# EAGLE board Up (EAGLE 8.2.2)
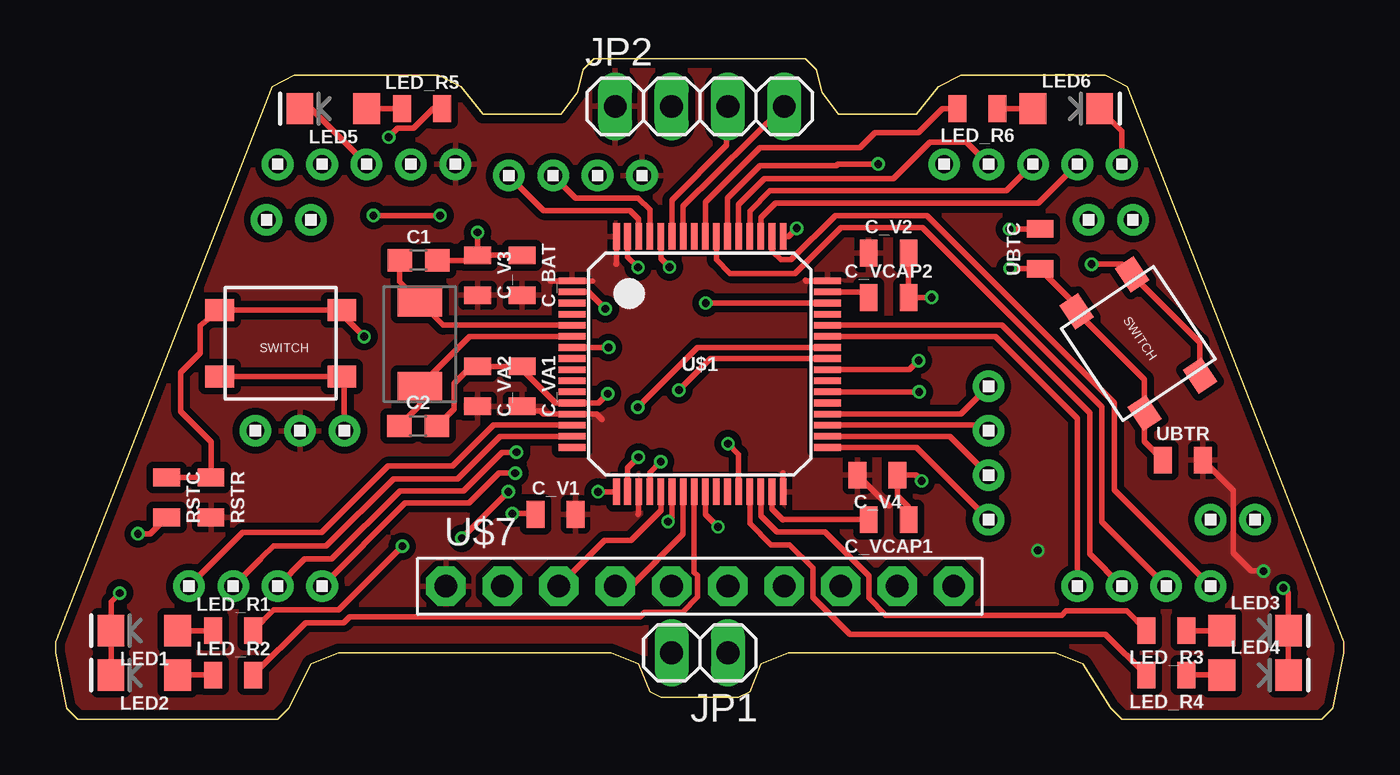
[diagram p0: board, top side]
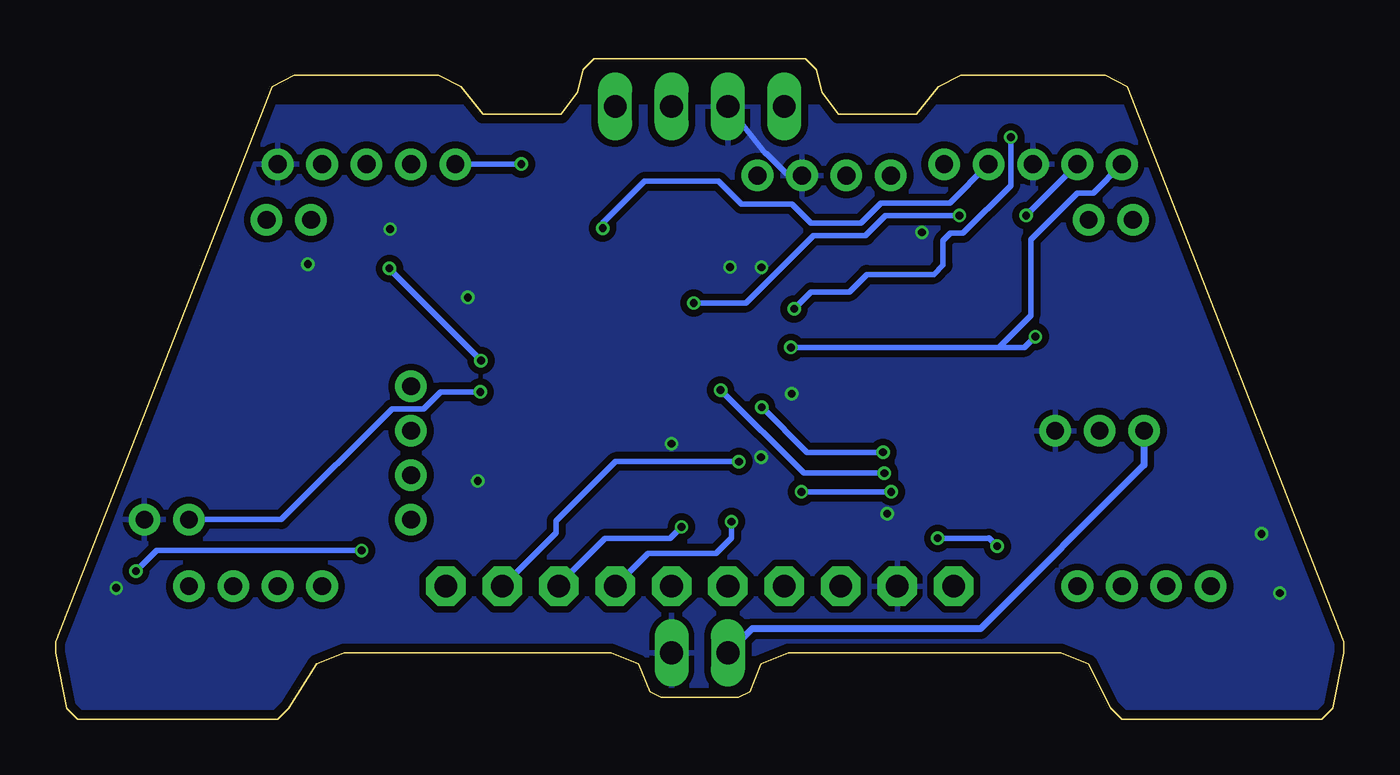
[diagram p1: board, bottom side, seen from below]

Size 58 x 29.75 mm. Coordinates in mm from the lower left corner, seen from the top.
Outline: 47.25,29 40.75,29 39.75,28.5 38.75,27.25 35.25,27.25 34.5,28.25 34.25,29.25 33.75,29.75 24.25,29.75 23.75,29.25 23.5,28.25 22.75,27.25 19.25,27.25 18.25,28.5 17.25,29 10.75,29 9.75,28.5 0,3.5 0,3 0.5,0.5 1,0 10,0 10.5,0.5 11.5,2.5 12.75,3 25,3 26.25,2.5 26.75,1.25 27.25,1 30.75,1 31.25,1.25 31.75,2.5 33,3 45,3 46.25,2.5 47.5,0.5 48,0 57,0 57.5,0.5 58,3 58,3.5 48.25,28.5 47.25,29
Copper layers (1*16): Top 0.035559375mm / dielectric 1.6mm / Bottom 0.035559375mm
Design rules "oshpark-2layer *": minimum track width 6mil, minimum drill 10mil, track to track 6mil, track to pad 6mil, pad to pad 6mil, via to via 6mil, smd to smd 6mil, copper to edge 15mil, drill to drill 6mil, minimum pad ring 5mil, minimum via ring 5mil, stop-mask expansion 2.5mil, vias tented up to drill 0mil, thermal gap 10mil

## Footprints (pad centres in the part's own frame; a part is rotated, then mirrored left to right if it is on the bottom)
0603 = smd 1.1 x 1: 1 -0.85,0; 2 0.85,0
0805 = smd 0.8 x 1.2: 1 -0.9,0; 2 0.9,0
OSC = smd 1.3 x 2: P$1 0,0.1; P$2 3.8,0.1
1X02 = drill 1.016 long: 1 -1.27,0; 2 1.27,0
1X04 = drill 1.016 long: 1 -3.81,0; 2 -1.27,0; 3 1.27,0; 4 3.81,0
LED-1206 = smd 1.2 x 1.4: A -1.5,0; C 1.5,0
1X4 = drill 0.8 pad 1.422: 1 -3,0; 2 -1,0; 3 1,0; 4 3,0
1X5 = drill 0.8 pad 1.422: 1 -4,0; 2 -2,0; 3 0,0; 4 2,0; 5 4,0
STM32F405/415_LQFP64 = smd 0.3 x 1.2: BOOT0 -1.75,5.75; PA3 -3.75,-5.75; PA4 -2.25,-5.75; PA5 -1.75,-5.75; PA6 -1.25,-5.75; PA7 -0.75,-5.75; PA14 3.75,5.75; PA15 3.25,5.75; PB0 0.75,-5.75; PB1 1.25,-5.75; PB2 1.75,-5.75; PB3 0.75,5.75; PB4 0.25,5.75; PB5 -0.25,5.75; PB6 -0.75,5.75; PB7 -1.25,5.75; PB8 -2.25,5.75; PB9 -2.75,5.75; PB10 2.25,-5.75; PB11 2.75,-5.75; PC4 -0.25,-5.75; PC5 0.25,-5.75; PC10 2.75,5.75; PC11 2.25,5.75; PC12 1.75,5.75; PD2 1.25,5.75; VCAP_1 3.25,-5.75; VDD_0 -2.75,-5.75; VDD_1 3.75,-5.75; VDD_3 -3.75,5.75; VSS_0 -3.25,-5.75; VSS_1 -3.25,5.75 | smd 1.2 x 0.3: NRST -5.75,0.75; PA0_WKUP -5.75,-2.75; PA1 -5.75,-3.25; PA2 -5.75,-3.75; PA8 5.75,0.25; PA9 5.75,0.75; PA10 5.75,1.25; PA11 5.75,1.75; PA12 5.75,2.25; PA13 5.75,2.75; PB12 5.75,-3.75; PB13 5.75,-3.25; PB14 5.75,-2.75; PB15 5.75,-2.25; PC0 -5.75,0.25; PC1 -5.75,-0.25; PC2 -5.75,-0.75; PC3 -5.75,-1.25; PC6 5.75,-1.75; PC7 5.75,-1.25; PC8 5.75,-0.75; PC9 5.75,-0.25; PC13 -5.75,3.25; PC14 -5.75,2.75; PC15 -5.75,2.25; PH0 -5.75,1.75; PH1 -5.75,1.25; VBAT -5.75,3.75; VCAP_2 5.75,3.25; VDD_2 5.75,3.75; VDDA -5.75,-2.25; VSSA -5.75,-1.75
1X3 = drill 0.8 pad 1.422: 1 -2,0; 2 0,0; 3 2,0
1X2 = drill 0.8 pad 1.422: 1 -1,0; 2 1,0
1X10-BIG = drill 1.016 pad 1.778 octagon: 1 -11.43,0; 2 -8.89,0; 3 -6.35,0; 4 -3.81,0; 5 -1.27,0; 6 1.27,0; 7 3.81,0; 8 6.35,0; 9 8.89,0; 10 11.43,0
4X4X1.5_SMD_SWITCH = smd 1.3 x 1: INA -2.75,-1.5; INB 2.75,-1.5; OUTA -2.75,1.5; OUTB 2.75,1.5

## Placement (x,y rotation side)
C1  12pF  [0603]  16.34,20.67 0 top
C2  12pF  [0603]  16.32,13.21 0 top
C_BAT  2.2uF  [0805]  21,20 270 top
C_V1  0.1uF  [0805]  22.51,9.23 0 top
C_V2  0.1uF  [0805]  37.5,21 0 top
C_V3  0.1uF  [0805]  19,20 270 top
C_V4  0.1uF  [0805]  37,11 180 top
C_VA1  2.2uF  [0805]  21,15 270 top
C_VA2  0.1uF  [0805]  19,15 270 top
C_VCAP1  2.2uF  [0805]  37.5,9 180 top
C_VCAP2  2.2uF  [0805]  37.5,19 0 top
CX5032GA  OSC  [OSC]  16.5,15 90 top
JP1  [1X02]  29,3 180 top
JP2  [1X04]  29,27.61 0 top
LED1  BLUE  [LED-1206]  4,4 180 top
LED2  BLUE  [LED-1206]  4,2 180 top
LED3  BLUE  [LED-1206]  54,4 0 top
LED4  BLUE  [LED-1206]  54,2 0 top
LED5  BLUE  [LED-1206]  12.5,27.5 180 top
LED6  BLUE  [LED-1206]  45.5,27.5 0 top
LED_R1  1k  [0805]  8,4 0 top
LED_R2  1k  [0805]  8,2 0 top
LED_R3  1k  [0805]  50,4 180 top
LED_R4  1k  [0805]  50,2 180 top
LED_R5  1k  [0805]  16.5,27.5 0 top
LED_R6  1k  [0805]  41.5,27.5 180 top
LM  1X4  [1X4]  9,6 0 top
RM  1X4  [1X4]  49,6 0 top
RSTC  0.1uf  [0805]  5,10 270 top
RSTR  10K  [0805]  7,10 270 top
SPI2  1X4  [1X4]  42,12 90 top
SWD  1X5  [1X5]  14,25 0 top
SWD1  1X5  [1X5]  44,25 180 top
U$1  STM32F405/415_LQFP64  [STM32F405/415_LQFP64]  29,16 0 top
U$3  1X3  [1X3]  11,13 180 top
U$4  1X2  [1X2]  10.5,22.5 0 top
U$5  1X2  [1X2]  47.5,22.5 0 top
U$7  PINHD-1X10  [1X10-BIG]  29,6 0 top
U$8  1X4  [1X4]  23.4,24.49 180 top
U$9  4X4X1.5_SMD_SWITCH  [4X4X1.5_SMD_SWITCH]  10.14,16.94 180 top
U$10  4X4X1.5_SMD_SWITCH  [4X4X1.5_SMD_SWITCH]  48.74,16.92 303.8 top
U$11  1X2  [1X2]  53,9 0 top
UBTC  0.1uf  [0805]  44.32,21.19 90 top
UBTR  10K  [0805]  50.75,11.68 0 top

## Library data of the parts
C1 C2 = SparkFun-Capacitors; PROD_ID: CAP-07876
C_BAT C_V1-C_V4 C_VA1 C_VA2 C_VCAP1 C_VCAP2 RSTC UBTC = SparkFun-Capacitors; PROD_ID: CAP-08402
CX5032GA = Cristal Oscillator
JP1 JP2 = pinhead
LED1-LED6 = SparkFun-LED; PROD_ID: DIO-09911
LED_R1-LED_R6 RSTR UBTR = SparkFun-Resistors; PROD_ID: RES-08474
LM RM SPI2 SWD SWD1 U$3-U$5 U$8 U$11 = headers(2mm)
U$1 = STM32F405RG
U$7 = adafruit
U$9 U$10 = 4X4X1.5_SMD_SWITCH

## Nets
3.3V: C_BAT.2 C_V1.2 C_V2.1 C_V3.2 C_V4.2 C_VA1.2 C_VA2.2 JP2.1 RSTR.2 SWD.5 U$1.VBAT U$1.VDD_0 U$1.VDD_1 U$1.VDD_2 U$1.VDD_3 U$1.VDDA U$3.2 U$7.1 U$8.1 UBTR.2
AGND: JP1.2 U$3.3
FAN_PWM: U$1.PC7 U$11.1
GND: C1.2 C2.2 C_BAT.1 C_V1.1 C_V2.2 C_V3.1 C_V4.1 C_VA1.1 C_VA2.1 C_VCAP1.1 C_VCAP2.2 JP1.1 JP2.2 LED1.C LED2.C LED3.C LED4.C LED5.C LED6.C RSTC.2 SWD1.1 SWD.3 U$1.BOOT0 U$1.PB2 U$1.VSS_0 U$1.VSS_1 U$1.VSSA U$3.1 U$7.2 U$8.2 U$9.OUTA U$9.OUTB U$10.OUTA U$10.OUTB U$11.2 UBTC.2
INT: U$1.PC5 U$7.8
LED1: LED_R1.2 U$1.PA3
LED2: LED_R2.2 U$1.PC4
LED3: LED_R4.2 U$1.PB10
LED4: LED_R3.2 U$1.PB11
LED5: LED_R5.2 U$1.PC13
LED6: LED_R6.2 U$1.PB4
LENCA: LM.1 U$1.PA0_WKUP
LENCB: LM.2 U$1.PA1
LPWMA: LM.4 U$1.PA8
LPWMB: LM.3 U$1.PA9
N$1: LED3.A LED_R3.1
N$2: LED4.A LED_R4.1
N$3: LED5.A LED_R5.1
N$4: LED6.A LED_R6.1
N$5: LED2.A LED_R2.1
N$8: LED1.A LED_R1.1
OSC_IN: C1.1 CX5032GA.P$2 U$1.PH0
OSC_OUT: C2.1 CX5032GA.P$1 U$1.PH1
RENCA: RM.3 U$1.PB3
RENCB: RM.4 U$1.PA15
RESET: RSTC.1 RSTR.1 SWD.1 U$1.NRST U$9.INA U$9.INB
RPWMA: RM.1 U$1.PA10
RPWMB: RM.2 U$1.PA11
RX: JP2.3 U$1.PB7
SCL: U$1.PB8 U$8.3
SDA: U$1.PB9 U$8.4
SPI1_MISO: U$1.PA6 U$7.7
SPI1_MOSI: U$1.PA7 U$7.4
SPI1_NSS: U$1.PA4 U$7.9
SPI1_SCK: U$1.PA5 U$7.3
SPI2_MISO: SPI2.3 U$1.PB14
SPI2_MOSI: SPI2.4 U$1.PB15
SPI2_NSS: SPI2.1 U$1.PB12
SPI2_SCK: SPI2.2 U$1.PB13
SPI3_MISO: SWD1.3 U$1.PC11
SPI3_MOSI: SWD1.4 U$1.PC12
SPI3_NSS: SWD1.5 U$1.PD2
SPI3_SCK: SWD1.2 U$1.PC10
SWCLK: SWD.4 U$1.PA14
SWDIO: SWD.2 U$1.PA13
TX: JP2.4 U$1.PB6
UBT: U$1.PC9 U$10.INA U$10.INB UBTC.1 UBTR.1
VCAP_1: C_VCAP1.2 U$1.VCAP_1
VCAP_2: C_VCAP2.1 U$1.VCAP_2

## Tracks (layer width: path | path; a pad name or v marks a point on that pad's centre or on a via)
3.3V  (via drill 0.35)
  Top 0.254: C_VA1.2 21.21,13.89 21.84,13.89 21.98,13.75 U$1.VDDA 24.36,13.75 24.6,13.51 | 26.22,9.24 26.25,9.27 U$1.VDD_0 | U$1.VDD_1 32.75,11.09 32.74,11.1 | U$1.VDD_2 33.79,19.75 33.76,19.78 | 24.17,19.74 24.16,19.75 U$1.VBAT 22.28,19.75 22.27,19.76 | U$1.VDD_3 25.25,20.51 25.24,20.5 | C_V4.2 37.4,9.7 37.42,9.7 37.51,9.61 37.54,9.61 | UBTR.2 53.01,10.32 53.01,8.59 53.01,7.5 53.83,6.68 v54.38,6.68
  Bottom 0.254: v54.38,6.68 53.45,7.61 v44.22,7.61
  pour Top (isolate 0.305): -4.12,-4.71 62.31,-4.71 62.31,31.86 -4.13,31.86
AGND
  Bottom 0.305: U$3.3 9,11.45 16.36,4.09 26.64,4.09 JP1.2
FAN_PWM  (via drill 0.35)
  Top 0.254: U$1.PC7 v38.88,14.75
  Bottom 0.254: v38.88,14.75 40.66,14.75 41.42,13.99 41.59,13.99 42.85,13.99 47.84,9 U$11.1
GND  (via drill 0.35)
  Top 0.254: C_V2.2 C_VCAP2.2 v39.44,19 | C_VCAP1.1 38.4,9.57 37.9,10.07 C_V4.1 38.73,11 v38.99,10.74 | C2.2 17.93,13.97 17.93,15.13 18.7,15.9 C_VA2.1 C_VA1.1 21,15.75 22.5,14.25 U$1.VSSA 24.44,14.25 v24.86,14.67 | C1.2 18.77,20.67 C_V3.1 | C_V3.1 C_BAT.1 | U$1.VSS_1 25.75,20.83 v26.22,20.36 | U$1.BOOT0 27.25,20.76 v27.64,20.37 | U$1.VSS_0 25.75,11.32 v26.24,11.81 | C_V1.1 21.57,9.27 v20.56,9.27 | U$1.PB2 30.75,11.94 v30.27,12.42 | C_V3.1 v19,21.93 | UBTC.2 v42.95,22.09 v42.94,22.08 | v46.64,20.5 48,20.5 U$10.OUTA 51.52,16.98 U$10.OUTB | U$9.OUTB U$9.OUTA 13,15.16 U$3.1 | RSTC.2 4.26,8.36 v3.71,8.36 | LED2.C LED1.C 2.5,5.3 v2.89,5.69 | LED4.C LED3.C 55.5,5.69 v55.27,5.92 | SWD.3 11.5,27.5 LED5.C | SWD1.1 48,26.5 LED6.C
  Bottom 0.254: JP2.2 26.04,25.48 25.99,25.48 25,24.49 U$8.2
  pour Bottom (isolate 0.305): -0.43,2.98 -0.43,27.57 57.55,27.57 58.44,27.57 58.44,2.81 58.44,-0.99 -0.21,-0.99 -0.44,-0.99 -0.44,2.99
INT  (via drill 0.35)
  Top 0.254: U$1.PC5 29.25,9.24 v29.82,8.67
  Bottom 0.254: v29.82,8.67 30.33,8.16 33.26,8.16 35.35,6.07 U$7.8
LED1  (via drill 0.35)
  Top 0.254: v15.61,7.8 12.74,4.93 9.83,4.93 LED_R1.2 | v20.38,10.25 v18.29,8.16 | U$1.PA3 v24.42,10.25
  Bottom 0.254: v15.61,7.8 15.98,8.17 15.99,8.16 v18.29,8.16 | v24.42,10.25 v20.38,10.25
LED2
  Top 0.254: U$1.PC4 28.75,6.63 28.9,6.48 28.9,5.52 28.21,4.83 26.52,4.83 26.32,4.63 13.24,4.63 12.96,4.35 11.25,4.35 LED_R2.2
LED3
  Top 0.254: U$1.PB10 31.25,8.82 32.2,7.87 33.05,7.87 34.09,6.83 34.09,5.5 35.75,3.84 47.26,3.84 LED_R4.2
LED4
  Top 0.254: U$1.PB11 31.75,9.17 32.48,8.44 34.63,8.44 36.61,6.46 36.61,5.47 37.37,4.71 37.37,4.69 45.29,4.69 45.48,4.88 48.22,4.88 LED_R3.2
LED5  (via drill 0.35)
  Top 0.254: v15,26.22 15.4,26.62 16.12,26.62 16.99,27.5 LED_R5.2 | U$1.PC13 23.99,19.25 v24.75,18.49
  Bottom 0.254: v15,26.22 15,24.04 17.15,21.89 17.72,21.89 18.05,21.56 18.05,20.45 18.46,20.04 21.48,20.04 22.27,19.25 23.99,19.25 v24.75,18.49
LED6
  Top 0.254: U$1.PB4 29.25,23.29 31.71,25.75 36.22,25.75 36.89,26.42 38.83,26.42 39.92,27.5 LED_R6.2 40.41,27.5
LENCA
  Top 0.254: U$1.PA0_WKUP 19.72,13.25 17.88,11.41 14.97,11.41 11.99,8.43 8.43,8.43 LM.1
LENCB
  Top 0.254: U$1.PA1 20.01,12.75 18.09,10.83 15.21,10.83 12.19,7.81 9.81,7.81 9.31,7.31 9.24,7.24 LM.2
LPWMA  (via drill 0.35)
  Top 0.254: U$1.PA8 29.48,16.25 v28.06,14.83 | LM.4 15.74,9.74 18.62,9.74 19.97,11.09 v20.69,11.09
  Bottom 0.254: v20.69,11.09 24.32,11.09 v28.06,14.83
LPWMB  (via drill 0.35)
  Top 0.254: LM.3 11.22,7.22 12.43,7.22 15.51,10.3 18.37,10.3 20.1,12.03 v20.75,12.03 | v26.21,14.06 28.9,16.75 U$1.PA9
  Bottom 0.254: v26.21,14.06 24.18,12.03 v20.75,12.03
N$1
  Top 0.254: LED_R3.1 LED3.A
N$2
  Top 0.254: LED_R4.1 LED4.A
N$3
  Top 0.254: LED5.A LED_R5.1
N$4
  Top 0.254: LED_R6.1 LED6.A
N$5
  Top 0.254: LED_R2.1 LED2.A
N$8
  Top 0.254: LED_R1.1 LED1.A
OSC_IN
  Top 0.254: C1.1 15.49,19.71 CX5032GA.P$2 17.45,17.75 U$1.PH0
OSC_OUT
  Top 0.254: C2.1 16.4,14.14 CX5032GA.P$1 18.65,17.25 U$1.PH1
RENCA
  Top 0.254: RM.3 47.1,8.9 47.1,14.06 39.02,22.15 35.34,22.15 33.28,20.08 30.37,20.08 29.75,20.7 U$1.PB3
RENCB
  Top 0.254: U$1.PA15 32.25,21.1 32.65,20.7 33.11,20.7 35.1,22.69 39.23,22.69 47.66,14.26 47.66,10.34 RM.4
RESET  (via drill 0.35)
  Top 0.254: U$1.NRST v24.9,16.75 | v13.89,17.24 12.72,18.41 U$9.INA U$9.INB 6.51,17.73 6.51,16.49 5.64,15.62 5.64,13.86 7,12.5 RSTR.1 RSTC.1
  Bottom 0.254: v24.9,16.75 15.54,16.75 | 15.54,16.75 14.1,18.19 14.1,21.61 12,23.71 11.29,23.71 SWD.1 | 15.54,16.75 14.38,16.75 v13.89,17.24
RPWMA
  Top 0.254: U$1.PA10 42.31,17.25 46,13.56 RM.1
RPWMB
  Top 0.254: U$1.PA11 42.6,17.75 46.55,13.8 46.55,7.45 RM.2
RX
  Top 0.254: U$1.PB7 27.75,23.39 30.21,25.85 JP2.3
SCL
  Top 0.254: U$8.3 23.41,23.48 26.23,23.48 26.75,22.96 U$1.PB8
SDA
  Top 0.254: U$8.4 21.97,22.92 25.85,22.92 26.25,22.52 U$1.PB9
SPI1_MISO  (via drill 0.35)
  Top 0.254: U$1.PA6 27.75,9.09 v27.57,8.91
  Bottom 0.254: v27.57,8.91 27.57,8.18 28.27,7.48 31.33,7.48 U$7.7
SPI1_MOSI
  Top 0.254: U$1.PA7 28.25,8.35 25.9,6 U$7.4
SPI1_NSS  (via drill 0.35)
  Top 0.254: U$1.PA4 26.75,11.12 v27.24,11.61
  Bottom 0.254: U$7.9 37.87,6 35.46,8.41 35.46,8.94 32.79,11.61 v27.24,11.61
SPI1_SCK
  Top 0.254: U$7.3 24.71,8.06 25.9,8.06 27.25,9.41 U$1.PA5
SPI2_MISO
  Top 0.254: SPI2.3 41.75,13.25 U$1.PB14
SPI2_MOSI
  Top 0.254: U$1.PB15 40.75,13.75 SPI2.4
SPI2_NSS
  Top 0.254: U$1.PB12 38.75,12.25 SPI2.1
SPI2_SCK
  Top 0.254: U$1.PB13 40.25,12.75 SPI2.2
SPI3_MISO
  Top 0.254: U$1.PC11 31.25,22.89 32.17,23.81 42.81,23.81 SWD1.3
SPI3_MOSI
  Top 0.254: U$1.PC12 30.75,23.19 31.92,24.36 37.73,24.36 39.36,25.99 40.41,25.99 40.41,25.98 41.02,25.98 SWD1.4
SPI3_NSS  (via drill 0.35)
  Top 0.254: U$1.PD2 30.25,23.48 31.71,24.94 35.15,24.94 35.22,25.01 v37.03,25.01
  Bottom 0.254: v37.03,25.01 SWD1.5
SPI3_SCK
  Top 0.254: U$1.PC10 31.75,22.6 32.4,23.25 44.25,23.25 SWD1.2
SWCLK  (via drill 0.35)
  Top 0.254: U$1.PA14 33,21.75 v33.37,22.12
  Bottom 0.254: v33.37,22.12 33.37,22.34 31.48,24.23 28.15,24.23 27.12,23.2 24.85,23.2 24,22.35 21.74,22.35 20.84,23.25 17.75,23.25 SWD.4
SWDIO  (via drill 0.35)
  Top 0.254: U$1.PA13 v29.27,18.75 | v17.31,22.69 v14.31,22.69
  Bottom 0.254: v14.31,22.69 SWD.2 | v29.27,18.75 26.92,18.75 23.89,21.78 21.54,21.78 20.63,22.69 v17.31,22.69
TX
  Top 0.254: U$1.PB6 28.25,23.11 JP2.4
UBT  (via drill 0.35)
  Top 0.254: U$1.PC9 38.44,15.75 v38.85,16.16 | v42.97,20.31 44.3,20.31 UBTC.1 45.96,18.65 U$10.INA 49.02,15.31 U$10.INB 49.02,12.51 UBTR.1
  Bottom 0.254: v38.85,16.16 42.97,20.28 v42.97,20.31
VCAP_1
  Top 0.254: U$1.VCAP_1 32.25,9.49 32.75,8.99 32.76,9 C_VCAP1.2
VCAP_2
  Top 0.254: U$1.VCAP_2 36.35,19.25 C_VCAP2.1